# Altium PCB Gateway.PcbDoc
Units mil, origin at the board's own origin, x right, y up, seen from the top; angles counter-clockwise.
Board outline 3865 x 2905 mil, 2 copper layers (Top Layer, Bottom Layer); 20 components, 35 nets, 131 pads, 7 vias.
Unrouted connection lines stored in the file: 1.
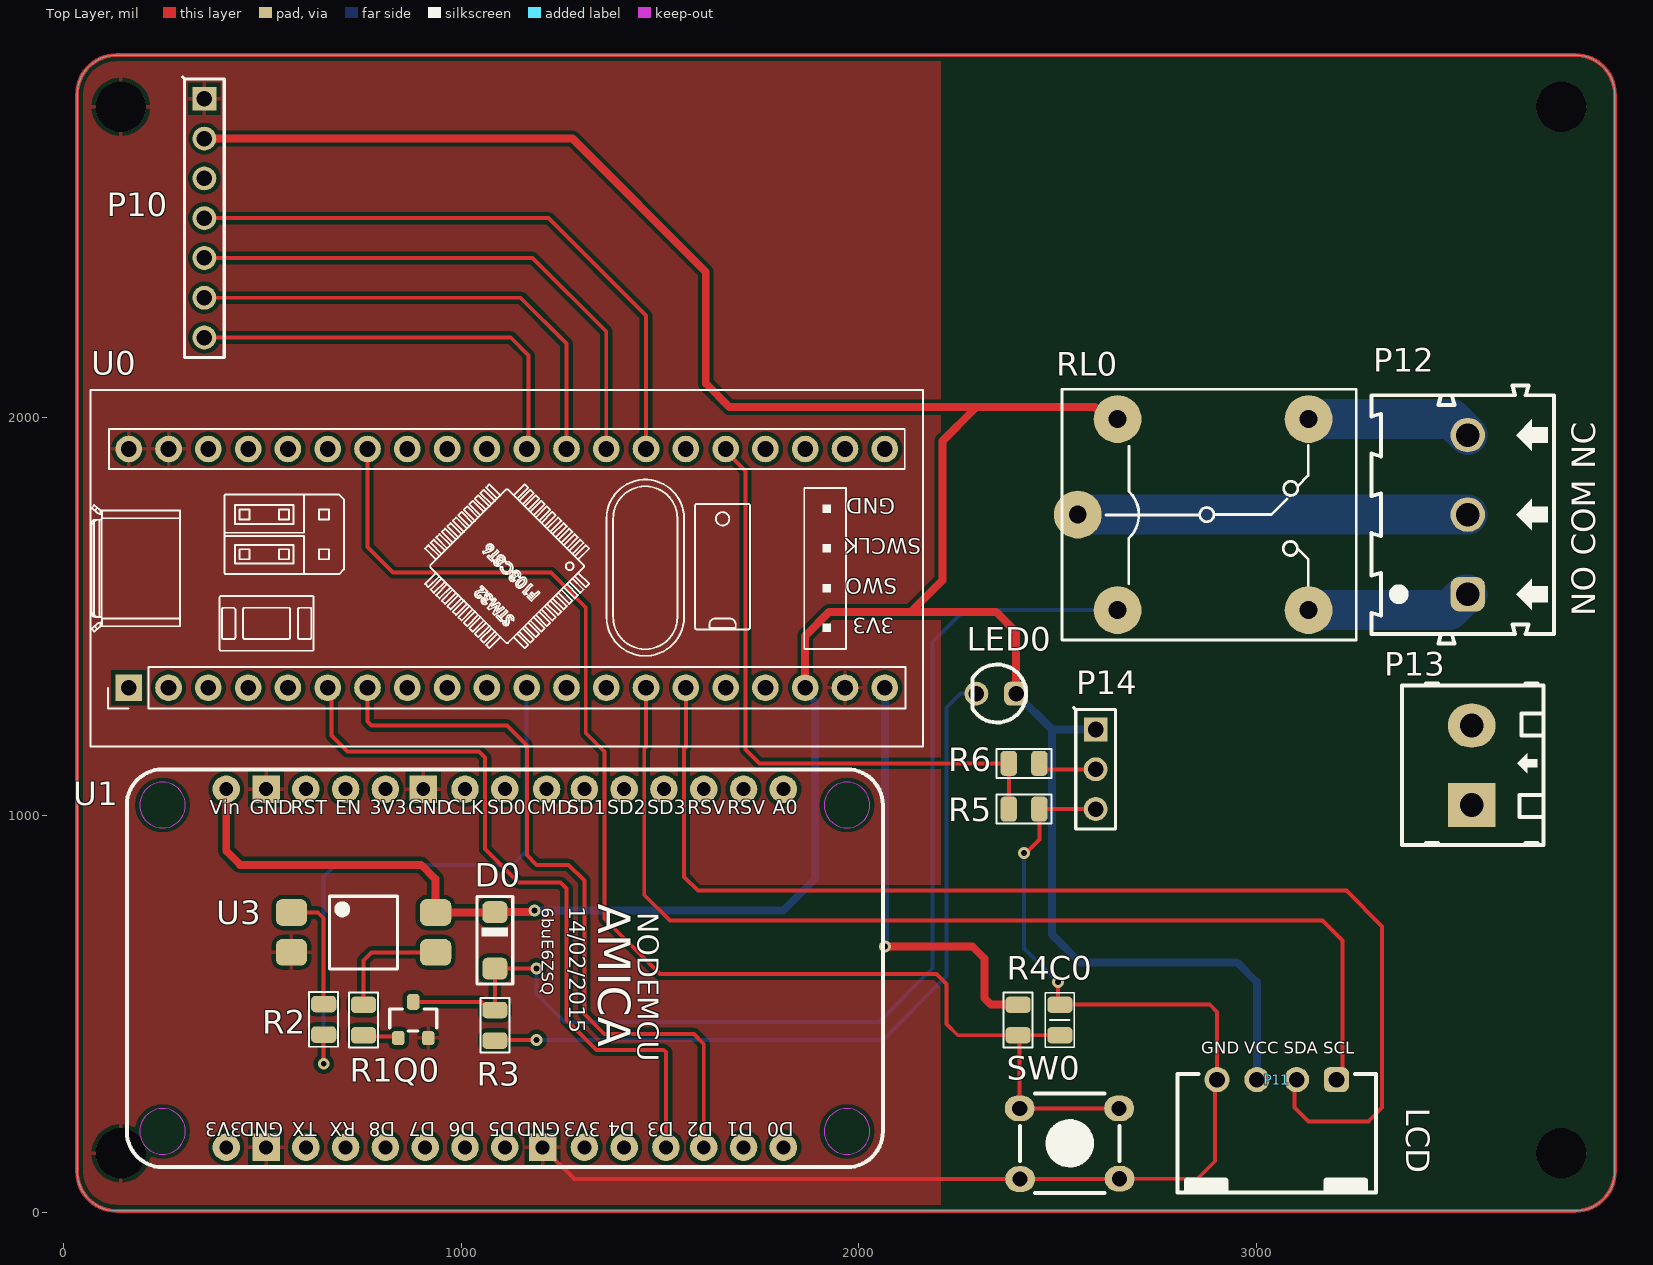
[diagram p0: Top Layer view]
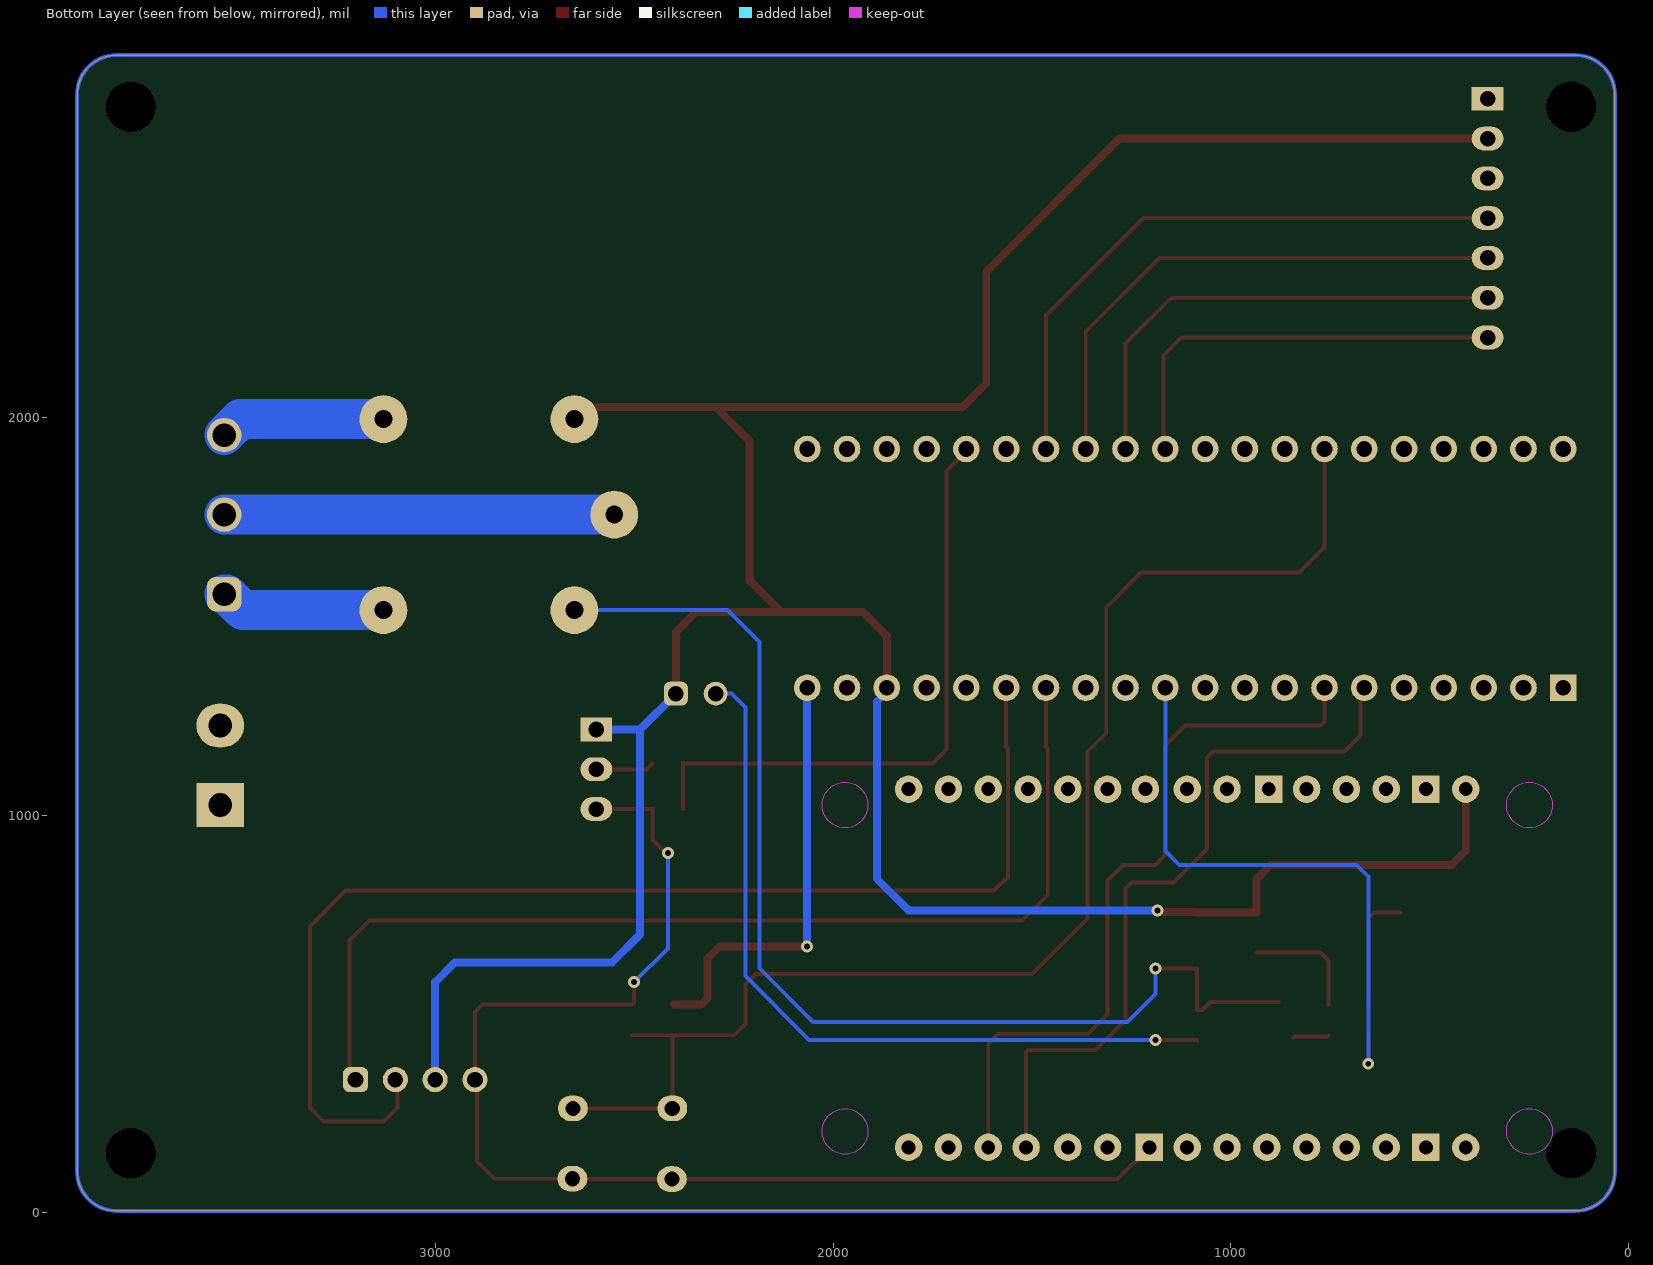
[diagram p1: Bottom Layer view, seen from below]
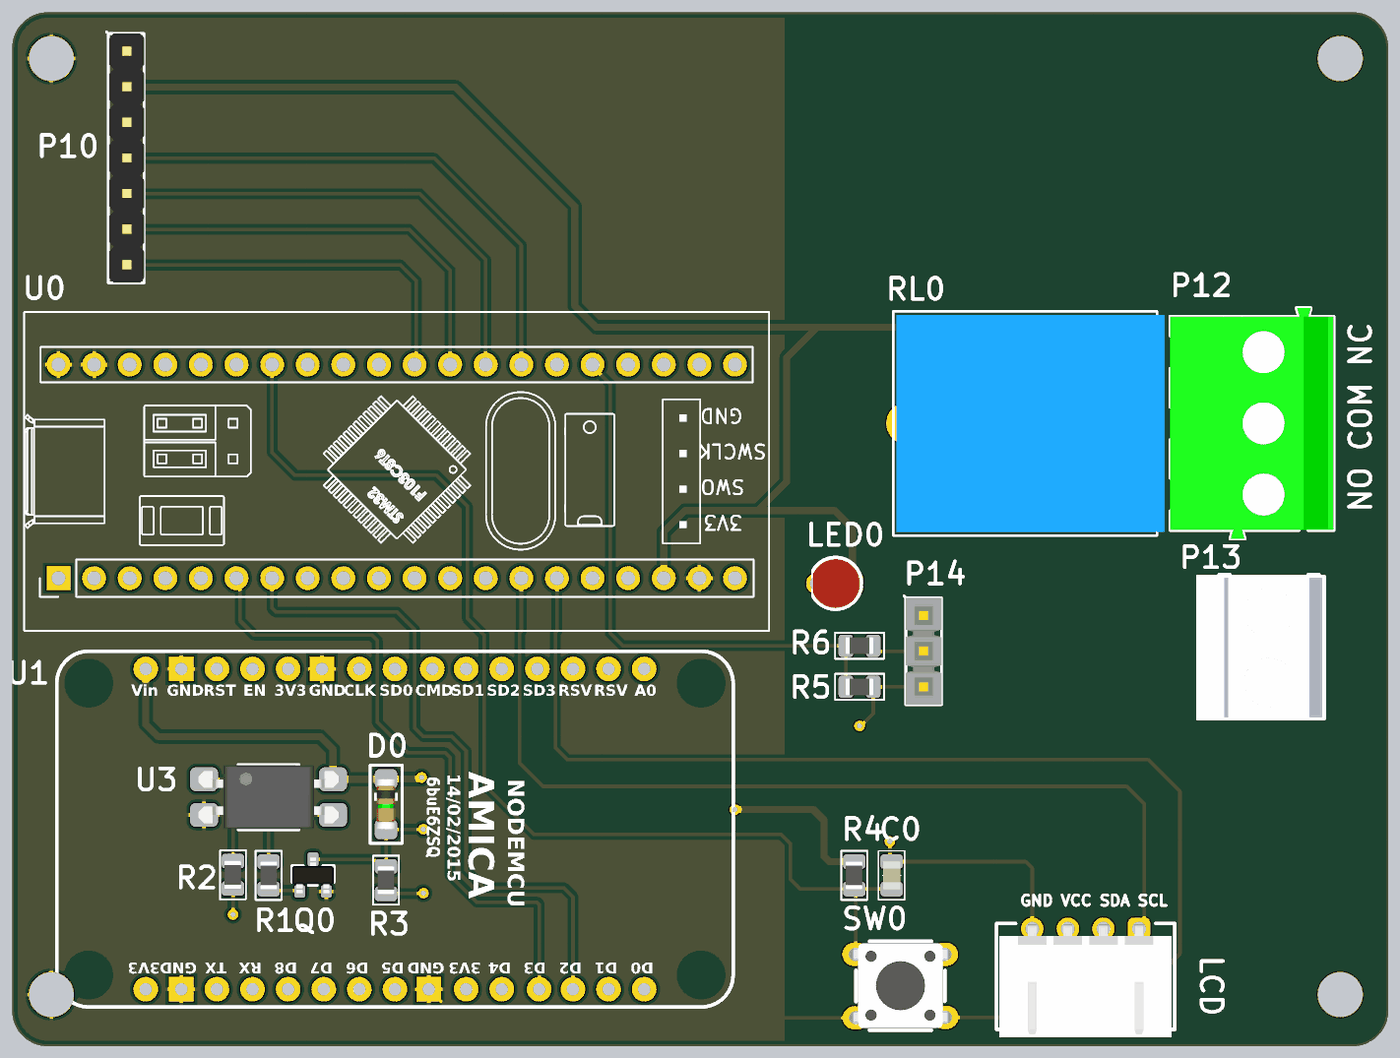
[diagram p2: 3D render of the assembled board from above, using the file's embedded part models]

## Layer stack, top to bottom
Top Solder: solder mask 0.4, Solder Resist, Dk 3.5
Top Layer: signal copper 1.4
Dielectric 1: dielectric 12.6, FR-4, Dk 4.8
Bottom Layer: signal copper 1.4
Bottom Solder: solder mask 0.4, Solder Resist, Dk 3.5

## Board outline
35,105 35,2810 cw(c135,2810) 135,2910 3800,2910 cw(c3800,2810) 3900,2810 3900,105 cw(c3800,105) 3800,5 135,5 cw(c135,105)

## Design rules (kind name [scope] priority, off if disabled: settings)
Clearance [All] p1: gap=10 ignorepadtopadclearanceinfootprint=FALSE except(0: Arc-Hole Track-Hole SMDPad-Hole THPad-Hole Via-Hole Fill-Hole Poly-Hole Region-Hole Text-Hole)
PolygonConnect [All] p1: connectstyle=Relief reliefconductorwidth=10 reliefentries=4 polygonreliefangle="90 Angle" airgapwidth=10
RoutingVias [All] p1: holewidth=15 width=30 viastyle="Through Hole" minholewidth=15 minwidth=30 maxholewidth=15 maxwidth=30
SolderMaskExpansion [All] p1: expansion=4 istentingtop=FALSE
Width [All] p1: maxlimit=100 minlimit=10 preferedwidth=10 minimp=50.000000 maximp=50.000000 favimp=50.000000
30 further rules are at their usual default settings.

## Components (designator, comment, footprint, x,y, rotation, side; value= is the part's Value field where it differs from the comment)
C0 "100nf" "C 0805 (2012)" 2505,485 r90 top
D0 "Diode" SOD-80 1085,685 r90 top
LED0 "Led" "LED 3MM" 2345,1305 r180 top
P10 "Header 7" "Header 7" 355,2800 r270 top
P11 "Header 4" XH2.54-4P-RA 3050,335 r180 top
P12 "Header 3" SH152-5.08-3P 3287.87,1455 r90 top
P13 "Header 2" "HDR Domino 2 - 5MM" 3540,1025 r90 top
P14 "Header 3" "Header 3" 2595,1215 r270 top
Q0 "Transistor NPN" SOT-23 880,485 r90 top
R1 "R" "R 0805 (2012)" 755,485 r90 top
R2 "R" "R 0805 (2012)" 655,486.61 r270 top
R3 "R0" "R 0805 (2012)" 1085,471.61 r270 top
R4 "R" "R 0805 (2012)" 2400,485 r270 top
R5 "R" "R 0805 (2012)" 2415,1015 r0 top
R6 "R" "R 0805 (2012)" 2415,1130 r180 top
RL0 "Relay 10A/12V" RL_SPDT_10A 2550,1755 r0 top value="Relay SPDT, 10A, 12V"
SW0 "Tact Switch" SW/4/DIP/SMALL 2530,175 r270 top
U0 "BluePill" YAAJ_BluePill_1 165,1320 r90 top
U1 "NodeMCU V1.0 ESP-12E" "NodeMCU V1.0 ESP-12E" 2056,1116 r270 top
U3 "PC817B" SOIC-4-GULLWING 755,705 r0 top

## Footprints (in the part's own frame and the unit in brackets; to place one, negate y for a bottom-side part, rotate by r counter-clockwise, add the part's x,y. Pads: shape width x height; smd on the part's side, far side on the other; paste and mask are expansions set on the pad)
"C 0805 (2012)" [mm] "Chip Capacitor, 2-Leads, Body 2.0x1.3mm, IPC Medium Density"
  rrect50% 1.05x1.6 smd: 1(-0.975,0) 2(0.975,0)
  silkscreen extent -1.75,-0.92 1.75,0.92, body extent -1,-0.62 1,0.63, height 0.6
"HDR Domino 2 - 5MM" [mil] "Header 2, 2 pin, hight 400mil, Pin to Pin 200mil, Colour Green"
  rect 110x120 hole 60: 1(0,0)
  oval 110x120 hole 60: 2(200,0)
  silkscreen extent -100,-180 305,175, body extent -97,-174 297,180, height 598
"Header 3" [mil]
  rect 60x60 / inner round 60 / far side rect 60x80 hole 39: 1(0,0)
  round 60 / inner round 60 / far side oval 60x80 hole 39: 2(100,0) 3(200,0)
  silkscreen extent -55,-55 250,50, body extent -50,-50 250,50, height 350
"Header 7" [mil]
  rect 60x60 / inner round 60 / far side rect 60x80 hole 39: 1(0,0)
  round 60 / inner round 60 / far side oval 60x80 hole 39: 2(100,0) 3(200,0) 4(300,0) 5(400,0) 6(500,0) 7(600,0)
  silkscreen extent -55,-55 650,50, body extent -51,-47 649,51, height 336
"LED 3MM" [mil]
  round 60 hole 39: 1(50,0)
  rrect50% 60x60 hole 39: 2(-50,0)
  silkscreen extent -75,-73 60,72, body extent -72,-69 60,69, height 177
"NodeMCU V1.0 ESP-12E" [mil]
  round 0 on Top Overlay paste+0 mask-300: 0(91,-86)
  round 0 on Top Overlay paste-300 mask-300: 0(91,-1806) 0(911,-86)
  round 69 hole 35: 3V3(51,-1246) 3V3(951,-746) 3V3(951,-1646) A0(51,-246) CLK(51,-1046) CMD(51,-841) D0(951,-246) D1(951,-346) D2(951,-446) D3(951,-541) D4(951,-646) D5(951,-946) D6(951,-1046) D7(951,-1146) D8(951,-1246) EN(51,-1346) RST(51,-1446) RSV(51,-346) RSV(51,-446) RX(951,-1346) SD0(51,-946) SD1(51,-746) SD2(51,-646) SD3(51,-546) TX(951,-1446) VIN(51,-1646)
  rect 69x69 hole 35: GND(51,-1151) GND(51,-1546) GND(951,-851) GND(951,-1546)
  oct 115x0 on Top Overlay paste-300 mask-300: ""(911,-1806)
  Keep-Out Layer circle w2: c91,-86 r57.5
  Keep-Out Layer circle w2: c911,-86 r57.5
  Keep-Out Layer circle w2: c91,-1806 r57.5
  Keep-Out Layer circle w2: c911,-1806 r57.5
  silkscreen extent 1,-1896 1001,4
"R 0805 (2012)" [mm] "Chip Resistor, 2-Leads, Body 2.0x1.3mm, IPC Medium Density"
  rrect50% 1.05x1.6 smd: 1(-0.975,0) 2(0.975,0)
  silkscreen extent -1.75,-0.92 1.75,0.92, body extent -1,-0.61 1,0.59, height 0.5
RL_SPDT_10A [mil] "Relay SPDT, 5 pin, 10A,W 650mil, L 800mil, H 800mil"
  round 120 hole 45 mask+4: 1(0,0)
  round 120 hole 45: 2(580,240) 3(580,-240) 4(100,-240) 5(100,240)
  silkscreen extent -40,-315 700,315, body extent -31,-305 721,305, height 602
SH152-5.08-3P [mm] "300V-15A, AWC 24-14"
  rrect50% 2.2x2.2 hole 1.5 mask+0: 1(2.54,-6.15)
  round 2.2 hole 1.5 mask+0.102: 2(7.62,-6.15)
  round 2.2 hole 1.5 mask+0: 3(12.7,-6.15)
  silkscreen extent -0.61,-11.65 15.85,0, body extent -0.61,-11.65 15.85,0, height 18
SOD-80 [mm] "SOD-80 MiniMelf Diod case LL4148 3.7x1.6x0.5mm"
  rrect50% 1.4x1.6 smd: 1(1.8,0) 2(-1.8,0)
  silkscreen extent -2.79,-1.14 2.79,1.14, body extent -1.8,-0.74 1.8,0.76, height 1.5
SOIC-4-GULLWING [mm]
  rrect50% 2x1.71 smd: 1(-4.6,1.27) 2(-4.6,-1.27) 3(4.6,-1.27) 4(4.6,1.27)
  silkscreen extent -2.16,-2.34 2.16,2.31, body extent -5,-2.29 5,2.29, height 3.83
SOT-23 [mm] "SOT23, 3-Leads, Body 3.0x2.5mm (max), Pitch 0.95mm, IPC Medium Density"
  rrect50% 0.9x0.8 smd: 1(-1.15,0.95) 2(-1.15,-0.95)
  rrect50% 1x0.8 smd: 3(1.15,0)
  silkscreen extent -0.71,-1.5 0.7,1.5, body extent -1.28,-1.46 1.27,1.46, height 0.95
SW/4/DIP/SMALL [mil]
  oval 65x75 hole 38: 1(-88,124) 2(89,125) 3(90,-125) 4(-88,-126)
  silkscreen extent -125,-125 125,125, body extent -119,-152 119,152, height 197
XH2.54-4P-RA [mm]
  rrect50% 1.6x1.6 hole 1: 1(-3.81,0)
  round 1.6 hole 1: 2(-1.27,0) 3(1.27,0) 4(3.81,0)
  silkscreen extent -6.35,-0.38 6.35,7.19, body extent -6.15,-0.3 6.15,7.73, height 5.84
YAAJ_BluePill_1 [mm]
  rect 1.7x1.7 hole 1: 1(0,0)
  round 1.7 hole 1: 2(0,-2.54) 3(0,-5.08) 4(0,-7.62) 5(0,-10.16) 6(0,-12.7) 7(0,-15.24) 8(0,-17.78) 9(0,-20.32) 10(0,-22.86) 11(0,-25.4) 12(0,-27.94) 13(0,-30.48) 14(0,-33.02) 15(0,-35.56) 16(0,-38.1) 17(0,-40.64) 18(0,-43.18) 19(0,-45.72) 20(0,-48.26) 21(15.24,-48.26) 22(15.24,-45.72) 23(15.24,-43.18) 24(15.24,-40.64) 25(15.24,-38.1) 26(15.24,-35.56) 27(15.24,-33.02) 28(15.24,-30.48) 29(15.24,-27.94) 30(15.24,-25.4) 31(15.24,-22.86) 32(15.24,-20.32) 33(15.24,-17.78) 34(15.24,-15.24) 35(15.24,-12.7) 36(15.24,-10.16) 37(15.24,-7.62) 38(15.24,-5.08) 39(15.24,-2.54) 40(15.24,0)
  silkscreen extent -3.75,-50.7 18.99,2.44

## Part data
C0: library part "Capacitor NP", "Capacitor non-pol"
D0: "Default Diode", Code_JEDEC=DO-214-AB, LatestRevisionDate=17-Jul-2002, LatestRevisionNote="Re-released for DXP Platform.", PackageReference=SMC, PackageVersion=Sep-1996, Published=8-Jun-2000, Publisher="Altium Limited"
LED0: "Typical LED"
P10: "Header, 7-Pin", LatestRevisionDate=17-Jul-2002, LatestRevisionNote="Re-released for DXP Platform.", Publisher="Altium Limited"
P11: "Header, 4-Pin"
P12 P14: "Header, 3-Pin"
P13: "Header, 2-Pin", LatestRevisionDate=17-Jul-2002, LatestRevisionNote="Re-released for DXP Platform.", Publisher="Altium Limited"
Q0: "NPN Bipolar Transistor"
R1 R2 R3 R4 R5 R6: library part Resistor, "Resistor", LatestRevisionDate=17-Jul-2002, LatestRevisionNote="Re-released for DXP Platform.", PackageReference=AXIAL-0.3, Published=8-Jun-2000, Publisher="Altium Limited"
RL0: library part "Relay 1", "Relay SPDT,10A - 12VDC 5 Pin"
SW0: library part "SW SPST-4", "Tact switch 4 pin"
U1: "NodeMCU V1.0 ESP8266 (ESP-12E)"
U3: library part "Opto PC817B"

## Free pads (board coordinates)
  round 125.98 hole 125.98: 3(145,150) 3(145,2780) 3(3765,150) 3(3765,2780)

## Via types
v1: diameter 30, hole 15, Top Layer to Bottom Layer, 7 vias

## Nets (pads, with @x,y where several pads share a name; then routed paths per layer and width w, separated by ;. In a path a pad name is that pad's centre, name@x,y a point inside that pad or via, vN(x,y) a via of type N, cw(c..) or ccw(c..) an arc to the next point about the centre after c; other vN are vias at no path point)
3.3V: R4.1 U0.20 U0.38 | length 1104.3
  Top Layer w20: v1(2065,670) 2285,670 2315,640 2315,540 2331.61,523.39 R4.1
  Bottom Layer w20: v1(2065,670) U0.20
+5: D0.1 LED0.2 P10.2 P11.3 P14.1 RL0.5 U0.18 U1.VIN U3.4 | length 8023.8
  Top Layer w20: P10.2 1280,2700 1615,2365 1615,2085 1675,2025 2592.94,2025 2622.94,1995 RL0.5 ; U1.VIN 410,910 445,875 900,875 936.1,838.9 U3.4 936.54,755.43 1084.57,755.43 D0.1 1178.16,755.87 1182.29,760 v1(1185,760) ; U0.18 1865,1450 1925,1510 2130,1510 ; 2290,2020 2210,1940 2210,1590 2130,1510 ; LED0.2 2395,1460 2345,1510 2130,1510
  Bottom Layer w20: v1(1185,760) 1810,760 1890,840 1890,1284.82 1865,1309.82 U0.18 ; LED0.2 2485,1215 ; P14.1 2485,1215 ; P11.3 3000,580 2950,630 2555,630 2485,700 2485,1215
BT0: C0.1 R4.2 SW0.1 SW0.4 U0.34 | length 3419
  Top Layer w10: U0.34 765,1673.65 829.57,1609.08 1225.92,1609.08 1313.46,1521.54 1313.46,1206.54 1360,1160 1360,740 1500,600 2195,600 2220,575 2220,475 2248.39,446.61 C0.1 ; R4.2 2404,442.61 SW0.4 SW0.1
DHT: 
E_OUT: R5.1 R6.2 U0.25 | length 1566.8
  Top Layer w10: U0.25 1665,1915 1715,1865 1715,1165 1750,1130 R6.2 R5.1
ESP_RX: U0.7 U1.D2 | length 1882.8
  Top Layer w10: U0.7 765,1235 775,1225 1115,1225 1165.5,1174.5 1165.5,899.5 1190,875 1270,875 1310,835 1310,500 1360,450 1585,450 1610,425 U1.D2
ESP_TX: U0.6 U1.D3 | length 1861
  Top Layer w10: U0.6 675,1310 675,1200 715,1160 1045,1160 1060.5,1144.5 1060.5,914.5 1145,830 1250,830 1265,815 1265,485 1340,410 1509.14,410 1515,404.14 U1.D3
GND: C0.2 P10.1 P11.4 P14.3 pad.3@145,150 pad.3@145,2780 Q0.2 R5.2 SW0.2 SW0.3 U0.19 U0.39 U0.40 U1.GND U3.2 | length 3210.8
  Top Layer w10: U1.GND@1205,165 1285,85 SW0.3 2405.5,85.5 2654.5,85.5 SW0.2 2851,86 2895,130 2895,330 P11.4 2900,505 2881.61,523.39 C0.2 2500,528.39 v1(2500,580) ; v1(2415,905) 2420,905 2453.39,938.39 R5.2 P14.3
  Bottom Layer w10: v1(2415,905) 2415,665 v1(2500,580)
LCD_SCL: P11.1 U0.14 | length 2680.5
  Top Layer w10: U0.14 1465,1171.35 1460.5,1166.85 1460.5,799.5 1525,735 3165,735 3215,685 3215,350 P11.1
LCD_SDA: P11.2 U0.15 | length 3059.5
  Top Layer w10: U0.15 1565,1171.35 1560.5,1166.85 1560.5,844.5 1595,810 3225,810 3315,720 3315,265 3280,230 3130,230 3095,265 3095,330 P11.2
LORA_AUX: P10.3
LORA_M0: P10.7 U0.30 | length 1070.7
  Top Layer w10: P10.7 1125,2200 1170,2155 1170,1925 U0.30
LORA_M1: P10.6 U0.29 | length 1222.6
  Top Layer w10: P10.6 1150,2300 1265,2185 U0.29
LORA_RX: P10.5 U0.28 | length 1381.6
  Top Layer w10: P10.5 1180,2400 1365,2215 U0.28
LORA_TX: P10.4 U0.27 | length 1546.5
  Top Layer w10: P10.4 1220,2500 1465,2255 U0.27
NetD0_2: D0.2 Q0.3 R3.1 RL0.4 | length 2885.1
  Top Layer w10: Q0.3 1051.01,530.28 1071.29,510 R3.1 D0.2 1085.43,614.57 v1(1189.57,614.57)
  Bottom Layer w10: v1(1189.57,614.57) 1189.57,550.43 1260,480 2050,480 2185,615 2185,1435 2265,1515 RL0.4
NetLED0_1: LED0.1 R3.2 | length 1966.5
  Top Layer w10: R3.2 1085.89,434.11 1189.11,434.11 v1(1190,435)
  Bottom Layer w10: v1(1190,435) 2060,435 2220,595 2220,1270 2255,1305 LED0.1
NetP12_1: P12.1 RL0.3 | length 416.6
  Bottom Layer w100: RL0.3 3483.69,1515 3523.69,1555 P12.1
NetP12_2: P12.2 RL0.1 | length 980
  Bottom Layer w100: RL0.1 P12.2
NetP12_3: P12.3 RL0.2 | length 416.6
  Bottom Layer w100: RL0.2 3490,1995 P12.3
NetP14_2: P14.2 R6.1 | length 147.8
  Top Layer w10: R6.1 2468.39,1115 P14.2
NetQ0_1: Q0.1 R1.1 | length 90.5
  Top Layer w10: R1.1 758.44,443.17 839.15,443.17 Q0.1
NetR1_2: R1.2 U3.3 | length 301
  Top Layer w10: R1.2 755,635 775,655 U3.3
NetR2_1: R2.1 U3.1 | length 302.3
  Top Layer w10: U3.1 640,755 655,740 R2.1
NPK_RX: 
NPK_TX: 
RELAY: R2.2 U0.11 | length 1490.2
  Top Layer w10: v1(655,375) R2.2
  Bottom Layer w10: v1(655,375) 655,845 685,875 1130,875 1165,910 U0.11
RS485_A: 
RS485_B: 
RS485_GND: 
RS485_VCC: 
SOIL_0: 
SOIL_1: 
SOIL_A0: 
SOIL_D0: 
pads on no net: P13.1 P13.2 U0.1 U0.2 U0.3 U0.4 U0.5 U0.8 U0.9 U0.10 U0.12 U0.13 U0.16 U0.17 U0.21 U0.22 U0.23 U0.24 U0.26 U0.31 U0.32 U0.33 U0.35 U0.36 U0.37 U1. U1.0 U1.3V3 U1.A0 U1.CLK U1.CMD U1.D0 U1.D1 U1.D4 U1.D5 U1.D6 U1.D7 U1.D8 U1.EN U1.RST U1.RSV U1.RX U1.SD0 U1.SD1 U1.SD2 U1.SD3 U1.TX

## Polygon pours and split planes (outlines as drawn)
GND on Top Layer "GND_L01_P000" (solid, remove dead copper, pour order 0): -720,3190 -680,3230 2205,3230 2205,-420 1930,-695 -1395,-695

## Other copper
Multi-Layer:
  the board outline again, w10

## Silkscreen, mask and mechanical layers (free items; w line width, h text height)
Top Overlay:
  text "NO COM NC" at 3850,1500 h60 r90
  text "GND VCC SDA SCL" at 2860,400 h30
  text "LCD" at 3375,265 h60 r270

## Text inside footprints (layer, text, board x,y; h text height)
U0: Top Overlay "GND" at 2091.14,1795.59 h39.37 r180; Top Overlay "SWCLK" at 2157.22,1695.59 h39.37 r180; Top Overlay "SWO" at 2096.11,1595.59 h39.37 r180; Top Overlay "3V3" at 2089.08,1495.59 h39.37 r180; Mechanical 6 "REF**" at 1191.1,1645.59 h39.37 r180; Mechanical 2 "Y@@J" at 167.13,1448.78 h19.68 r180
U1: Top Overlay "GND" at 868,990 h60; Top Overlay "3V3" at 771,990 h60; Top Overlay "EN" at 684,990 h60; Top Overlay "RST" at 572,990 h60; Top Overlay "GND" at 469,990 h60; Top Overlay "Vin" at 369,990 h60; Top Overlay "D7" at 934.77,240 h60 r180; Top Overlay "D8" at 834.89,240 h60 r180; Top Overlay "RX" at 735.94,240 h60 r180; Top Overlay "TX" at 637,240 h60 r180; Top Overlay "GND" at 553.8,240 h60 r180; Top Overlay "3V3" at 450,240 h60 r180; Top Overlay "D6" at 1035.88,240 h60 r180; Top Overlay "CMD" at 1166.86,990 h60; Top Overlay "D0" at 1836,240 h60 r180; Top Overlay "D1" at 1734.65,240 h60 r180; Top Overlay "D2" at 1634.42,240 h60 r180; Top Overlay "D3" at 1534.42,240 h60 r180; Top Overlay "D4" at 1436,240 h60 r180; Top Overlay "3V3" at 1350.99,240 h60 r180; Top Overlay "GND" at 1249,240 h60 r180; Top Overlay "D5" at 1135,240 h60 r180; Top Overlay "A0" at 1783,990 h60; Top Overlay "RSV" at 1669,990 h60; Top Overlay "RSV" at 1568.57,990 h60; Top Overlay "SD3" at 1468.14,990 h60; Top Overlay "SD2" at 1367.71,990 h60; Top Overlay "SD1" at 1267.29,990 h60; Top Overlay "SD0" at 1066.43,990 h60; Top Overlay "CLK" at 966,990 h60; Top Overlay "6buE6ZSQ" at 1203,767 h30 r270; Top Overlay "NODEMCU" at 1427,756 h90 r270; Top Overlay "AMICA" at 1317,777 h140 r270; Top Overlay "14/02/2015" at 1258,771 h69 r270